# Altium PCB ContollerRMC.PcbDoc
Units mm, origin at the board's own origin, x right, y up, seen from the top; angles counter-clockwise.
Board outline 32.5 x 40 mm, 2 copper layers (Top Layer, Bottom Layer), stack 1.58 mm thick; 25 components, 18 nets, 127 pads, 20 vias.
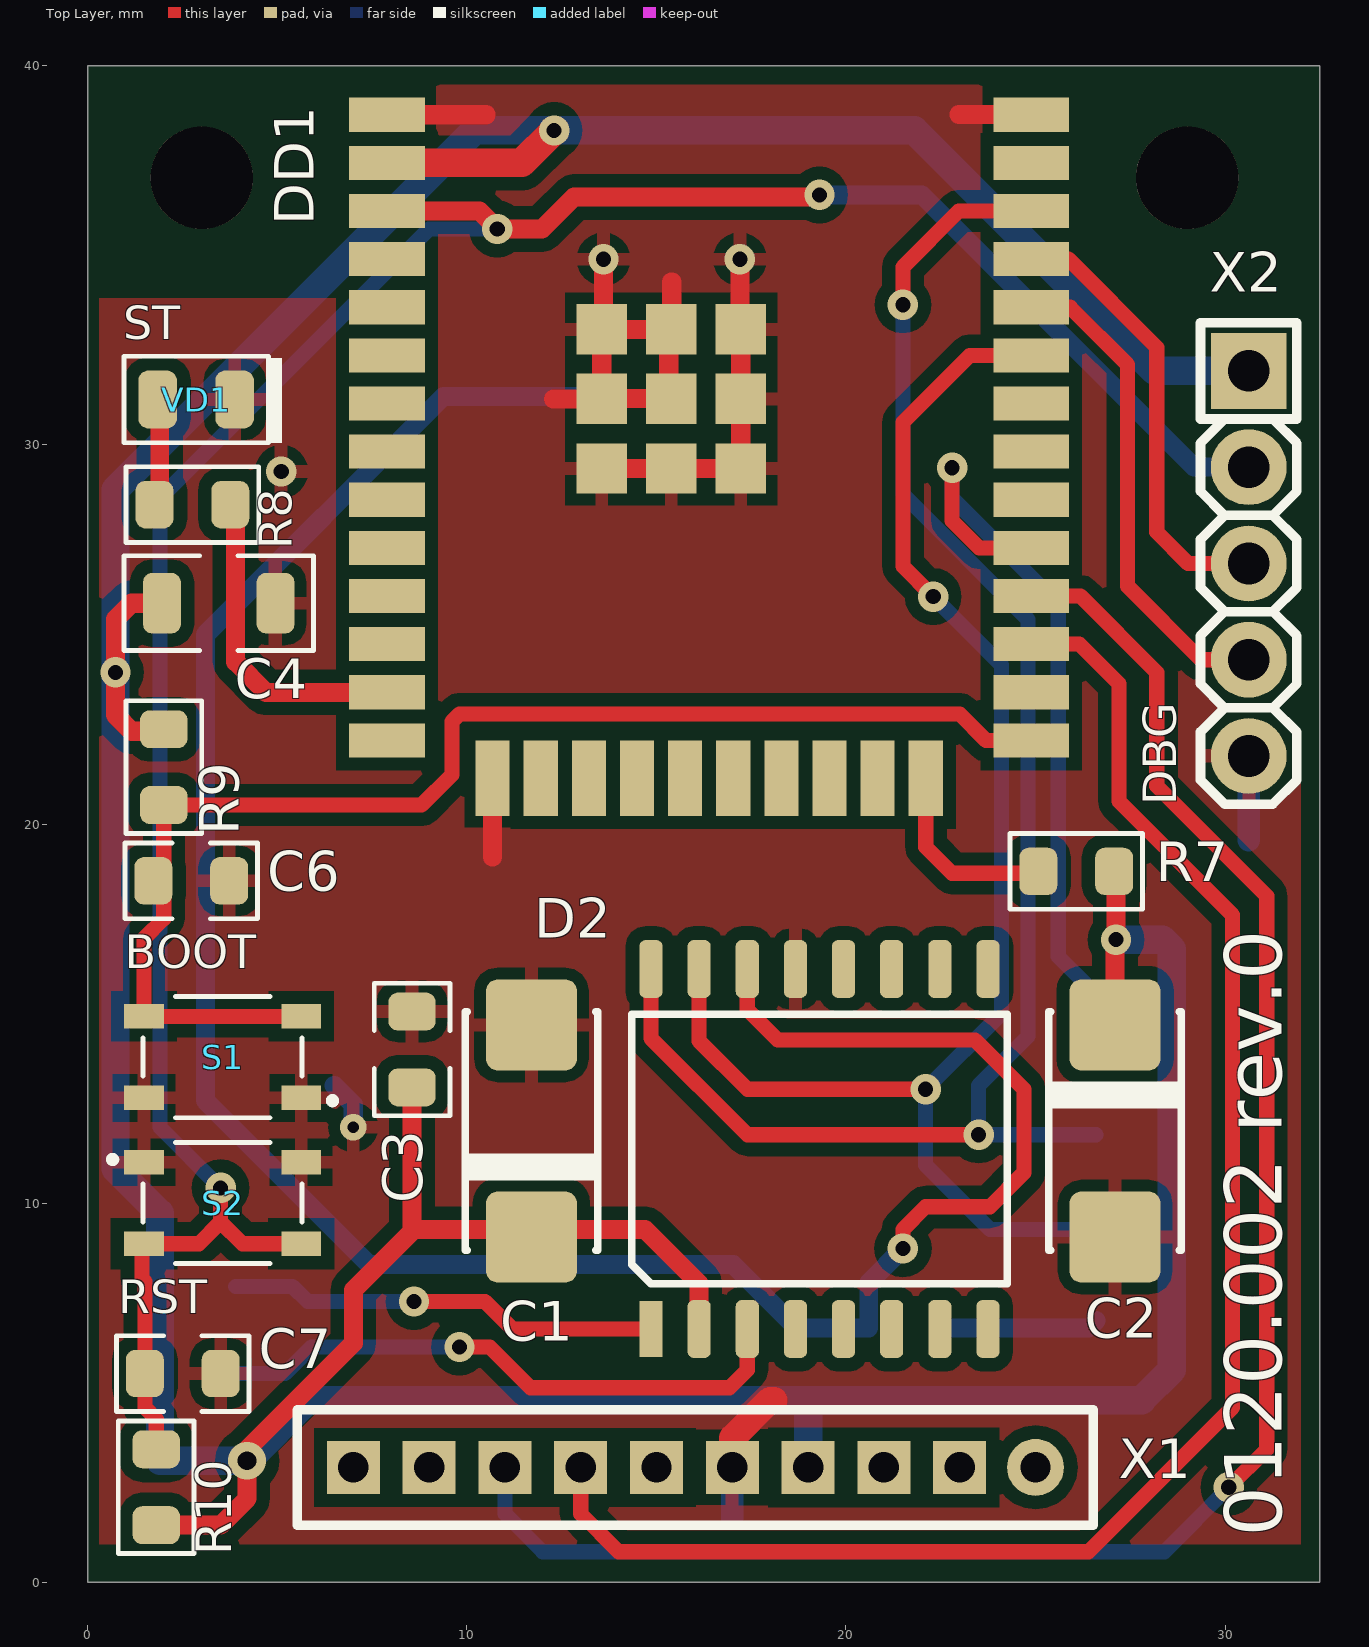
[diagram p0: Top Layer view]
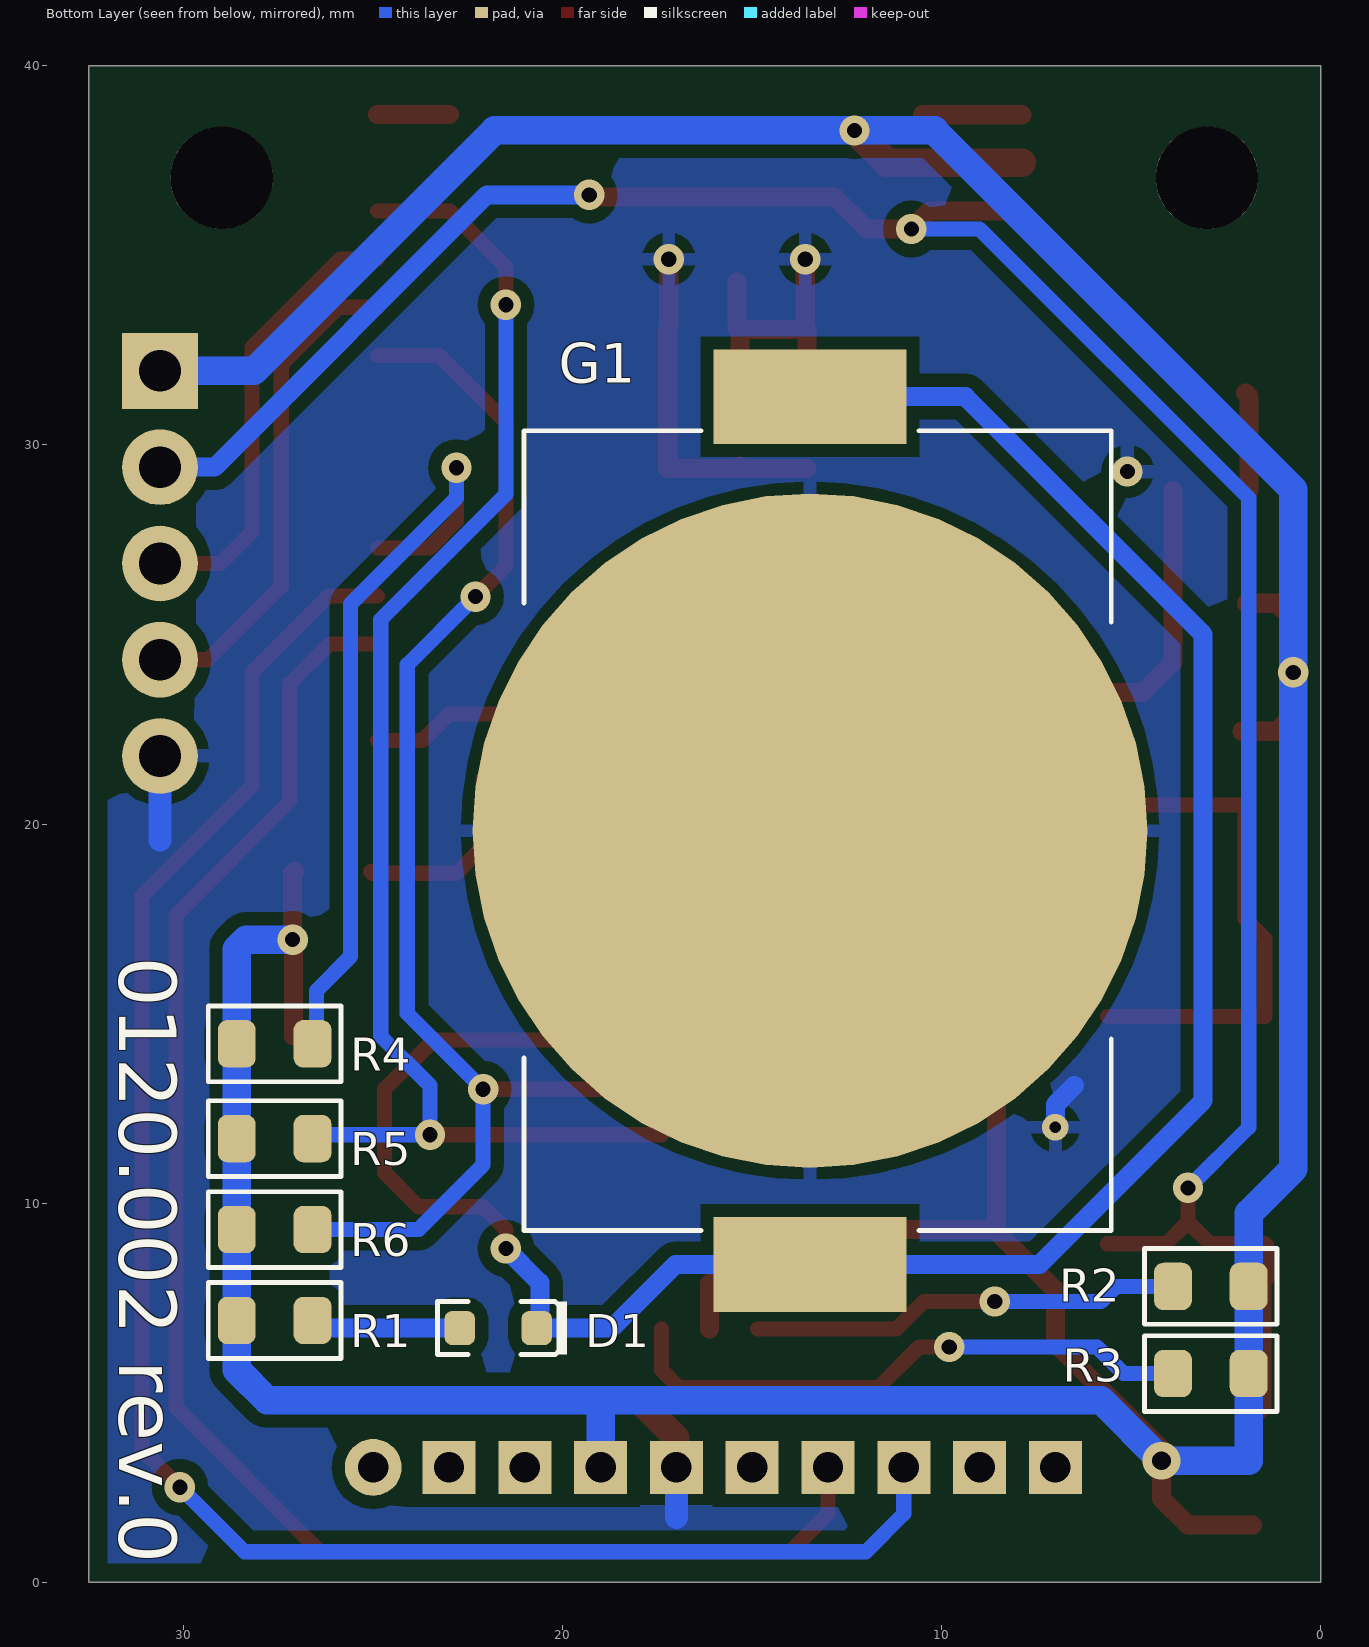
[diagram p1: Bottom Layer view, seen from below]
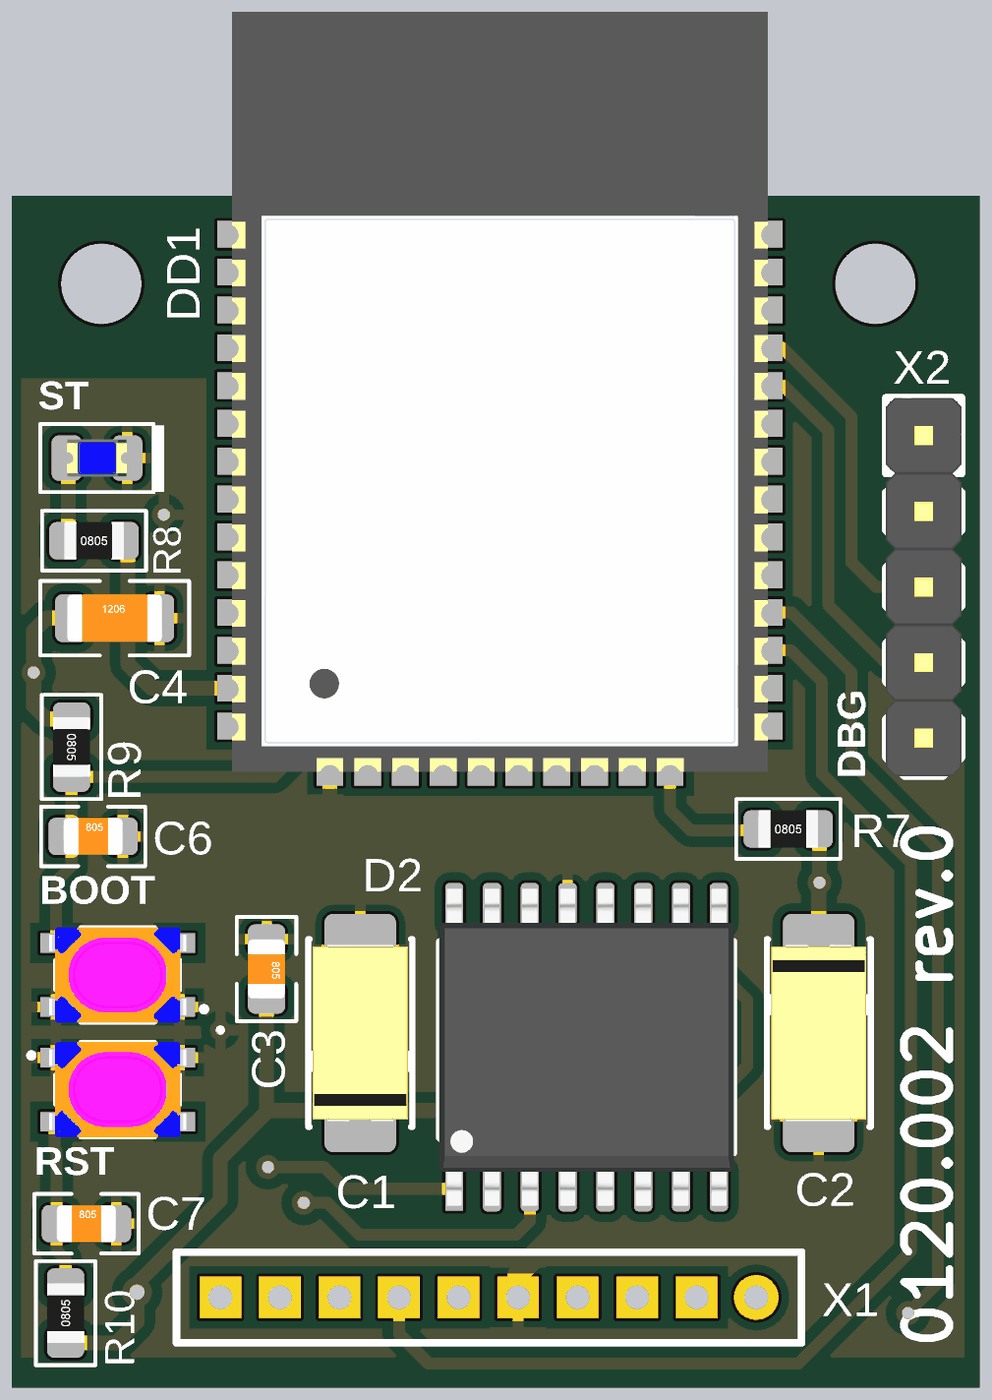
[diagram p2: 3D render of the assembled board from above, using the file's embedded part models]
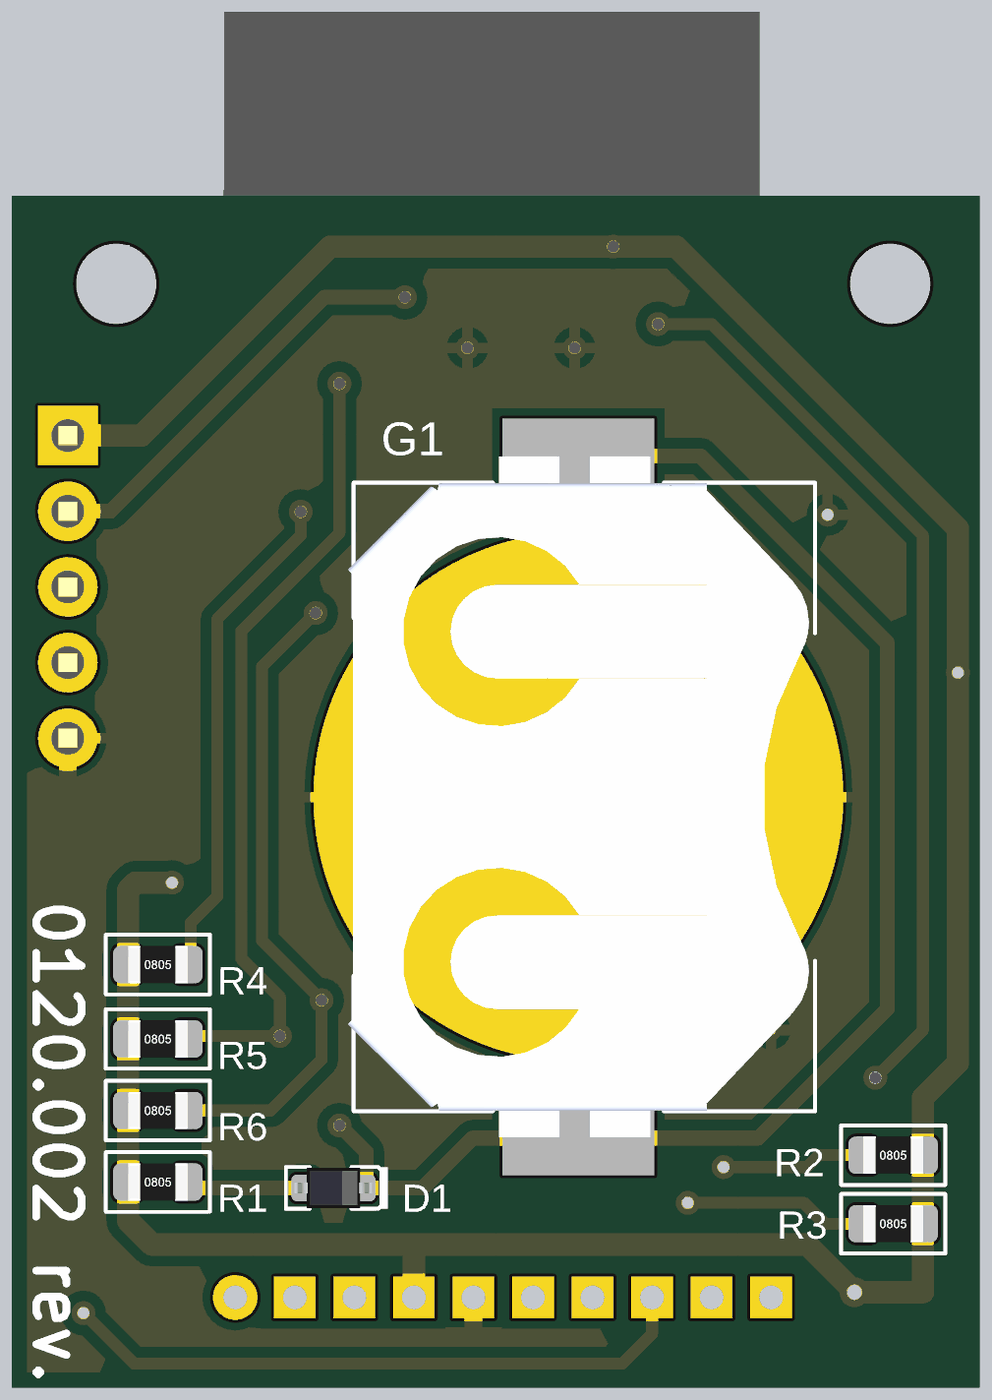
[diagram p3: 3D render of the assembled board from below, using the file's embedded part models]

## Layer stack, top to bottom
Top Solder: solder mask 0.0102, Solder Resist, Dk 3.5
Top Layer: signal copper 0.0356
Dielectric 1: dielectric 1.509, FR-4, Dk 4.8
Bottom Layer: signal copper 0.0356
Bottom Solder: solder mask 0.0102, Solder Resist, Dk 3.5

## Board outline
0,40 32.5,40 32.5,0 0,0

## Design rules (kind name [scope] priority, off if disabled: settings)
Clearance [All] p1: gap=0.3 ignorepadtopadclearanceinfootprint=FALSE except(0: Arc-Hole Track-Hole SMDPad-Hole THPad-Hole Via-Hole Fill-Hole Poly-Hole Region-Hole Text-Hole; 0.35: Arc-Poly Track-Poly SMDPad-Poly THPad-Poly Via-Poly Fill-Poly Poly-Poly)
PlaneClearance [All] p1: clearance=0.5
PlaneConnect [All] p1: planeconnectstyle=Relief reliefexpansion=0.4 reliefentries=4 reliefconductorwidth=0.35 reliefairgap=0.3
PolygonConnect [All] p1: connectstyle=Relief reliefconductorwidth=0.35 reliefentries=4 polygonreliefangle="90 Angle" airgapwidth=0.3
RoutingVias [All] p1: holewidth=0.4 width=0.8 viastyle="Through Hole" minholewidth=0.3 minwidth=0.6 maxholewidth=0.8 maxwidth=1.5
SolderMaskExpansion [All] p1: expansion=0.102
Width [All] p1: maxlimit=2 minlimit=0.3 preferedwidth=0.5
28 further rules are at their usual default settings.

## Components (designator, comment, footprint, x,y, rotation, side; value= is the part's Value field where it differs from the comment)
C1 "100u" "EL Case C (6032-28)" 11.7,11.9 r90 top
C2 "100u" "EL Case C (6032-28)" 27.1,11.9 r270 top
C3 "0.1u" C0805(2013) 8.55,14.05 r270 top
C4 "100n" C1206(3216) 3.45,25.825 r0 top
C6 "1mf" C0805(2013) 2.725,18.5 r0 top
C7 "10uf" C0805(2013) 2.5,5.5 r0 top
D1 "1N4148WS" SOD323 21.7,6.7 r180 bottom
D2 "DS3231SN" SO16-300 19.3,11.425 r0 top locked
DD1 "ValueManufacturerPartNumber" ESP32-WROOM-32D 16.39,31.215 r0 top locked
G1 "BAT" "BAT: BTH-R36-20" 13.475,19.825 r90 bottom locked
R1 "220" R0805 27.6,6.9 r180 bottom
R2 "4.7k" R0805 2.9,7.8 r180 bottom
R3 "4.7k" R0805 2.9,5.5 r180 bottom
R4 "10k" R0805 27.6,14.2 r180 bottom
R5 "4.7k" R0805 27.6,11.7 r180 bottom
R6 "4.7k" R0805 27.6,9.3 r180 bottom
R7 "4.7k" R0805 26.075,18.75 r0 top
R8 "220" R0805 2.756,28.426 r0 top
R9 "5k" R0805 2,21.5 r270 top
R10 "10k" R0805 1.8,2.5 r90 top
S1 "BOOT" BUT_SKRPACE010 3.55,13.85 r180 top locked
S2 "RST" BUT_SKRPACE010 3.55,10 r0 top locked
VD1 "ST" "Led 0805-Blue" 2.854,31.2 r0 top
X1 "*" "CON: PLS-10 - 2.0mm" 16,3.025 r180 top locked
X2 "DBG" "CON: PLS-5" 30.625,26.875 r270 top locked

## Footprints (in the part's own frame and the unit in brackets; to place one, negate y for a bottom-side part, rotate by r counter-clockwise, add the part's x,y. Pads: shape width x height; smd on the part's side, far side on the other; paste and mask are expansions set on the pad)
"BAT: BTH-R36-20" [mm] "Батарейный отсек для CR2032 (L-KLS5-CR2032-09B)"
  rect 2.5x5.1 smd: 1(-11.45,0) 1(11.45,0)
  round 17.8 smd paste-10: 2(0,0)
  silkscreen extent -10.55,-7.95 10.55,7.55, body extent -11.43,-7.75 11.43,7.75, height 4.32
BUT_SKRPACE010 [mm]
  rect 1.05x0.65 smd: 1(-2.075,1.075) 1(2.075,1.075) 2(-2.075,-1.075) 2(2.075,-1.075)
  silkscreen extent -3.01,-1.6 2.1,1.6, body extent -2.3,-1.6 2.3,1.6, height 2.5
C0805(2013) [mm]
  rrect50% 1x1.25 smd: 1(-1,0) 2(1,0)
  silkscreen extent -1.75,-1 1.75,1, body extent -1,-0.62 1,0.63, height 0.73
C1206(3216) [mm]
  rrect50% 1x1.6 smd: 1(-1.5,0) 2(1.5,0)
  silkscreen extent -2.5,-1.25 2.5,1.25, body extent -1.6,-0.8 1.6,0.8, height 1
"CON: PLS-5" [mm]
  rect 2x2 hole 1.1: 1(-5.08,0)
  round 2 hole 1.1: 2(-2.54,0) 3(0,0) 4(2.54,0) 5(5.08,0)
  silkscreen extent -6.35,-1.27 6.35,1.27, body extent -6.35,-1.27 6.35,1.27, height 8.54
"CON: PLS-10 - 2.0mm" [mm] "PBS-10"
  round 1.5 hole 0.8: 1(-9,0)
  rect 1.4x1.4 hole 0.8: 2(-7,0) 3(-5,0) 4(-3,0) 5(-1,0) 6(1,0) 7(3,0) 8(5,0) 9(7,0) 10(9,0)
  silkscreen extent -10.52,-1.52 10.47,1.52
"EL Case C (6032-28)" [mm] "Capacitor, SM Tantalum; Body 6.0 x 3.2 mm (LxW typ)"
  rrect25% 2.4x2.4 smd: 1(-2.8,0) 2(2.8,0)
  silkscreen extent -3.15,-1.75 3.15,1.75, body extent -3,-1.6 3,1.6, height 2.51
ESP32-WROOM-32D [mm]
  rect 1.33x1.33 smd: 0(-2.835,-1.835) 0(-2.835,0) 0(-2.835,1.835) 0(-1,-1.835) 0(-1,0) 0(-1,1.835) 0(0.835,-1.835) 0(0.835,0) 0(0.835,1.835)
  rect 2x0.9 smd: 1(-8.5,7.5) 2(-8.5,6.23) 3(-8.5,4.96) 4(-8.5,3.69) 5(-8.5,2.42) 6(-8.5,1.15) 7(-8.5,-0.12) 8(-8.5,-1.39) 9(-8.5,-2.66) 10(-8.5,-3.93) 11(-8.5,-5.2) 12(-8.5,-6.47) 13(-8.5,-7.74) 14(-8.5,-9.01) 25(8.5,-9.01) 26(8.5,-7.74) 27(8.5,-6.47) 28(8.5,-5.2) 29(8.5,-3.93) 30(8.5,-2.66) 31(8.5,-1.39) 32(8.5,-0.12) 33(8.5,1.15) 34(8.5,2.42) 35(8.5,3.69) 36(8.5,4.96) 37(8.5,6.23) 38(8.5,7.5)
  rect 0.9x2 smd: 15(-5.715,-10.01) 16(-4.445,-10.01) 17(-3.175,-10.01) 18(-1.905,-10.01) 19(-0.635,-10.01) 20(0.635,-10.01) 21(1.905,-10.01) 22(3.175,-10.01) 23(4.445,-10.01) 24(5.715,-10.01)
  body extent -9,-10.54 9,14.96, height 3.2
"Led 0805-Blue" [mil]
  rrect50% 40x60 smd: 1(-40,0) 2(40,0)
  silkscreen extent -75,-45 89,45, body extent -40,-25 40,25, height 43
R0805 [mm]
  rrect50% 1x1.25 smd: 1(-1,0) 2(1,0)
  silkscreen extent -1.75,-1 1.75,1, body extent -1,-0.62 1,0.63, height 0.6
SO16-300 [mil]
  rect 24x58 smd mask+4: 1(-175,-187)
  rrect50% 24x60 smd mask+4: 2(-125,-187) 3(-75,-187) 4(-25,-187) 5(25,-187) 6(75,-187) 7(125,-187) 8(175,-187) 9(175,187) 10(125,187) 11(75,187) 12(25,187) 13(-25,187) 14(-75,187) 15(-125,187) 16(-175,187)
  silkscreen extent -195,-140 195,140, body extent -195,-210 195,210, height 67
SOD323 [mm]
  rrect50% 0.8x0.9 smd: 1(-1.016,0) 2(1.016,0)
  silkscreen extent -1.6,-0.7 1.82,0.7, body extent -1.3,-0.67 1.3,0.67, height 1.1

## Part data
C1 C2: library part 100u-6.3V, "TECAP, 100 мкФ, 6.3 В, тип C, 10%"
C3 C6 C7: library part C-0805, "SMD-0805"
C4: library part "C-1206   50V 100n", "SMD-1206 50V Y5V +80/-20%"
D1: "SOD-323 100V 150mA"
D2: "I2C real-time clock (RTC) Integrated  RTC/TCXO/Crystal"
DD1: library part "ESP32 - WROOM - 32U", "ESP32-D0WD, Wi-Fi, BLE, 80 - 240MHz"
G1: library part BATCR1220, "BATTERY HOLDER COIN CR1220"
R1 R2 R3 R4 R5 R6 R7 R8 R9 R10: library part R-0805, "SMD 0805 0.1W 5% 150V"
S1 S2: library part "Button SMD 3х4х2.5", "SMD Button, 3х4х2.5 mm, 24VDC, 50mA"
VD1: library part "Led 0805 SMD 2013. TO-2013BC-BF", "BLUE 247мКд, 120°, 468нМ"
X1: library part 10-Connector
X2: library part 5-Connector

## Free pads (board coordinates)
  round 2.7 hole 2.7 unplated: 0(3,37.05) 0(29,37.05)

## Via types
v1: diameter 0.8, hole 0.4, Top Layer to Bottom Layer, tented both sides, 18 vias
v2: diameter 0.7, hole 0.3, Top Layer to Bottom Layer, tented both sides, 1 vias
v3: diameter 1, hole 0.5, Top Layer to Bottom Layer, tented both sides, 1 vias

## Nets (pads, with @x,y where several pads share a name; then routed paths per layer and width w, separated by ;. In a path a pad name is that pad's centre, name@x,y a point inside that pad or via, vN(x,y) a via of type N, cw(c..) or ccw(c..) an arc to the next point about the centre after c; other vN are vias at no path point)
+3V3: C1.1 C2.1 C3.2 C4.1 D2.2 DD1.2 R1.1 R2.2 R3.2 R4.1 R5.1 R6.1 R7.2 R9.1 R10.1 X1.4 X2.1 | length 144.2
  Top Layer w0.5: R10.1 3.5,1.5 4.2,2.2 v3(4.2,3.2) 4.2,3.5 7,6.3 7,7.7 8.6,9.3 ; C3.2 8.55,9.35 8.6,9.3 ; D2.2 16.125,7.875 14.7,9.3 8.6,9.3 ; R7.2 27.125,18.7 v1(27.125,16.95) 27.1,16.925 C2.1 C2.1@27.1,14.4
  Top Layer w0.508: C4.1 1.15,25.825 0.725,25.4 v1(0.725,24) 0.725,22.875 1.15,22.45 R9.1@2.075,22.45
  Top Layer w0.75: DD1.2 11.445,37.445 v1(12.3,38.3)
  Bottom Layer w0.5: R1.1@28.5,6.9 R1.1 ; R4.1@28.5,14.3 R4.1
  Bottom Layer w0.75: X1.4 19,4.8 ; v1(27.125,16.95) 28.35,16.95 28.6,16.7 R4.1 R5.1 R6.1 R1.1 28.6,5.6 27.8,4.8 19,4.8 ; X2.1 28.145,31.955 21.8,38.3 v1(12.3,38.3) 10.2,38.3 0.725,28.825 v1(0.725,24) 0.725,10.9 1.9,9.725 R2.2 1.9,3.2 v3(4.2,3.2) 5.8,4.8 19,4.8
BOOT: C6.1 DD1.25 R9.2 S1.2 | length 34.9
  Top Layer w0.4: S1.2@5.625,14.925 1.475,14.925 1.475,16.975 2,17.5 2,18.5 R9.2 8.8,20.5 9.6,21.3 9.6,22.7 9.8,22.9 23,22.9 23.695,22.205 DD1.25
EN/RST: C7.1 DD1.3 R10.2 S2.2 X2.2 | length 68.1
  Top Layer w0.4: R10.2 1.8,4.3 1.5,4.6 C7.1 1.5,7.925 1.425,8 1.425,8.875 1.475,8.925 2.925,8.925 3.5,9.5 ; v1(3.5,10.4) 3.5,9.5 ; S2.2@5.625,8.925 4.075,8.925 3.5,9.5
  Top Layer w0.5: DD1.3 10.325,36.175 v1(10.8,35.7) 11.98,35.7 12.822,36.542 19.242,36.542 v1(19.3,36.6)
  Bottom Layer w0.4: v1(3.5,10.4) 1.9,12 1.9,28.6 9,35.7 v1(10.8,35.7)
  Bottom Layer w0.5: v1(19.3,36.6) 22,36.6 29.185,29.415 X2.2
GND: C1.2 C2.2 C3.1 C4.2 C6.2 C7.2 D2.13 DD1.0 DD1.1 DD1.15 DD1.38 G1.2 S1.1 S2.1 VD1.2 X1.5 X2.5 | length 34.8
  Top Layer w0.254: DD1.0@15.325,33.115 DD1.0@15.39,33.05
  Top Layer w0.5: 10.675,19.125 DD1.15 ; 22.985,38.715 DD1.38
  Top Layer w0.508: DD1.1 10.5,38.715 ; 12.285,31.215 DD1.0@13.555,31.215 ; DD1.0@13.555,29.38 DD1.0@15.39,29.38 ; v1(13.6,34.9) 13.6,33.095 DD1.0@13.555,33.05 ; DD1.0@15.325,29.445 DD1.0@15.39,29.38 ; DD1.0@15.39,33.05 DD1.0@15.325,33.05 ; 15.4,34.3 15.4,33.19 15.325,33.115 DD1.0@15.325,33.05 ; v1(17.2,34.9) 17.2,33.075 17.225,33.05 17.225,31.215 17.225,29.38 DD1.0@15.39,29.38 ; DD1.0@13.555,31.215 13.565,31.225 15.325,31.225 DD1.0@15.325,33.05 ; DD1.0@13.555,31.215 DD1.0@13.555,33.05 ; DD1.0@13.555,33.05 DD1.0@15.325,33.05
  Top Layer w0.7: X1.5 17,3.8 18,4.8 18.1,4.8
  Bottom Layer w0.508: 6.5,13.1 7,12.6 v2(7,12)
  Bottom Layer w0.6: 17,1.7 X1.5 ; 30.625,19.575 X2.5
  other v1: 5.1,29.3
GPIO5: DD1.29 R4.2 | length 20.5
  Top Layer w0.4: v1(22.8,29.4) 22.8,28 23.515,27.285 DD1.29
  Bottom Layer w0.4: v1(22.8,29.4) 22.8,28.6 25.6,25.8 25.6,16.5 26.5,15.6 R4.2@26.5,14.2
I2C_SCL: D2.16 DD1.36 R5.2 | length 43.4
  Top Layer w0.4: D2.16 14.855,14.345 17.4,11.8 v1(23.5,11.8) ; v1(21.5,33.7) 21.5,34.7 22.975,36.175 DD1.36
  Bottom Layer w0.4: v1(21.5,33.7) 21.5,28.7 24.8,25.4 24.8,14.4 23.5,13.1 v1(23.5,11.8) R5.2@26.6,11.8
I2C_SDA: D2.15 DD1.33 R6.2 | length 39.2
  Top Layer w0.4: D2.15 16.125,14.275 17.4,13 v1(22.1,13) ; v1(22.3,26) 21.5,26.8 21.5,30.6 23.265,32.365 DD1.33
  Bottom Layer w0.4: v1(22.3,26) 24.1,24.2 24.1,15 v1(22.1,13) 22.1,11 23.8,9.3 R6.2
IO_2: DD1.24 R7.1 | length 5.1
  Top Layer w0.4: DD1.24 22.105,19.395 22.8,18.7 25.025,18.7 R7.1
NetD1_1: D1.1 R1.2 | length 4
  Bottom Layer w0.5: D1.1 26.4,6.7 R1.2
NetD1_2: D1.2 D2.14 G1.1 | length 63.5
  Top Layer w0.4: D2.14 17.395,15.105 18.2,14.3 23.4,14.3 24.7,13 24.7,10.8 23.8,9.9 22.1,9.9 21.5,9.3 v1(21.5,8.8)
  Bottom Layer w0.5: G1.1@13.475,31.275 9.375,31.275 3.1,25 3.1,12.7 7.425,8.375 13.475,8.375 17.025,8.375 18.7,6.7 20.6,6.7 20.6,7.9 v1(21.5,8.8)
NetD2_1: D2.1 R2.1 | length 11.4
  Top Layer w0.4: v1(8.6,7.4) 10.475,7.4 11.2,6.675 D2.1
  Bottom Layer w0.4: R2.1 5.4,7.8 5.8,7.4 v1(8.6,7.4)
NetD2_3: D2.3 R3.1 | length 15.5
  Top Layer w0.4: v1(9.8,6.2) 10.6,6.2 11.675,5.125 16.925,5.125 17.395,5.595 D2.3
  Bottom Layer w0.4: R3.1 5.2,5.5 5.9,6.2 v1(9.8,6.2)
NetR8_1: R8.1 VD1.1 | length 2.6
  Top Layer w0.5: R8.1@1.894,28.801 1.894,31.285 VD1.1@1.984,31.375
RX0: DD1.34 X2.4 | length 13
  Top Layer w0.4: DD1.34 25.915,33.635 27.425,32.125 27.425,26.275 29.365,24.335 X2.4
RX2: DD1.27 X1.7 | length 43.5
  Top Layer w0.4: X1.7 13,1.8 14,0.8 26.4,0.8 30.2,4.6 30.2,17.6 27.2,20.6 27.2,23.7 26.155,24.745 DD1.27
TX0: DD1.35 X2.3 | length 11.9
  Top Layer w0.4: DD1.35 25.87,34.905 28.2,32.575 28.2,27.7 29.025,26.875 X2.3
TX2: DD1.28 X1.8 | length 48.7
  Top Layer w0.4: DD1.28 26.185,26.015 28.2,24 28.2,21 31.1,18.1 31.1,3.5 v1(30.1,2.5)
  Bottom Layer w0.4: X1.8 11,1.8 12,0.8 28.4,0.8 v1(30.1,2.5)
VD_ST: DD1.13 R8.2 | length 8.9
  Top Layer w0.5: R8.2@3.894,28.801 3.894,24.275 4.694,23.475 DD1.13
pads on no net: D2.4 D2.5 D2.6 D2.7 D2.8 D2.9 D2.10 D2.11 D2.12 DD1.4 DD1.5 DD1.6 DD1.7 DD1.8 DD1.9 DD1.10 DD1.11 DD1.12 DD1.14 DD1.16 DD1.17 DD1.18 DD1.19 DD1.20 DD1.21 DD1.22 DD1.23 DD1.26 DD1.30 DD1.31 DD1.32 DD1.37 X1.1 X1.2 X1.3 X1.6 X1.9 X1.10

## Polygon pours and split planes (outlines as drawn)
GND on Bottom Layer "Bottom Layer-GND" (solid, remove dead copper, pour order 0): 0.5,39.5 32,39.5 32,0.5 0.5,0.5
GND on Top Layer "Top Layer-No Net" (solid, pour order 4): 0.3,39.5 32,39.5 32,1 0.3,1

## Other copper
Top Layer:
  pour cut-out: 26,40 32.525,40 32.5,27.175 28.75,27.175 28.75,32.575 26,35.425
  pour cut-out: 0,40 6.575,40 6.575,33.875 0,33.875
  pour cut-out: 10.329,22.505 10.334,22.5 22.607,22.5 22.107,23 10.4,23 10.2,22.8

## Silkscreen, mask and mechanical layers (free items; w line width, h text height)
Top Overlay:
  text "ST" at 0.925,32.5 h1.52
  text "DBG" at 29,20.5 h1.52 r90
  text "BOOT" at 0.975,15.9 h1.52
  text "RST" at 0.8,6.8 h1.52
  text "0120.002 rev.0" at 31.5,1.2 h1.52 r90
Bottom Overlay:
  text "0120.002 rev.0" at 31.7,16.5 h1.52 r90
Border:
  lines w0.254: 0,0 0,40 32.5,40 32.5,0 30,0 0,0
Size:
  circle w0.05: c29,37.05 r3
  circle w0.1: c3,37.05 r3